# Altium PCB Pet_Feeder_PCB.PcbDoc (part 3 of 3)
Units mil, origin at the board's own origin, x right, y up, seen from the top; angles counter-clockwise.
Board outline 3600 x 2700 mil, 2 copper layers (Top Layer, Bottom Layer); 99 components, 71 nets, 320 pads, 396 vias.
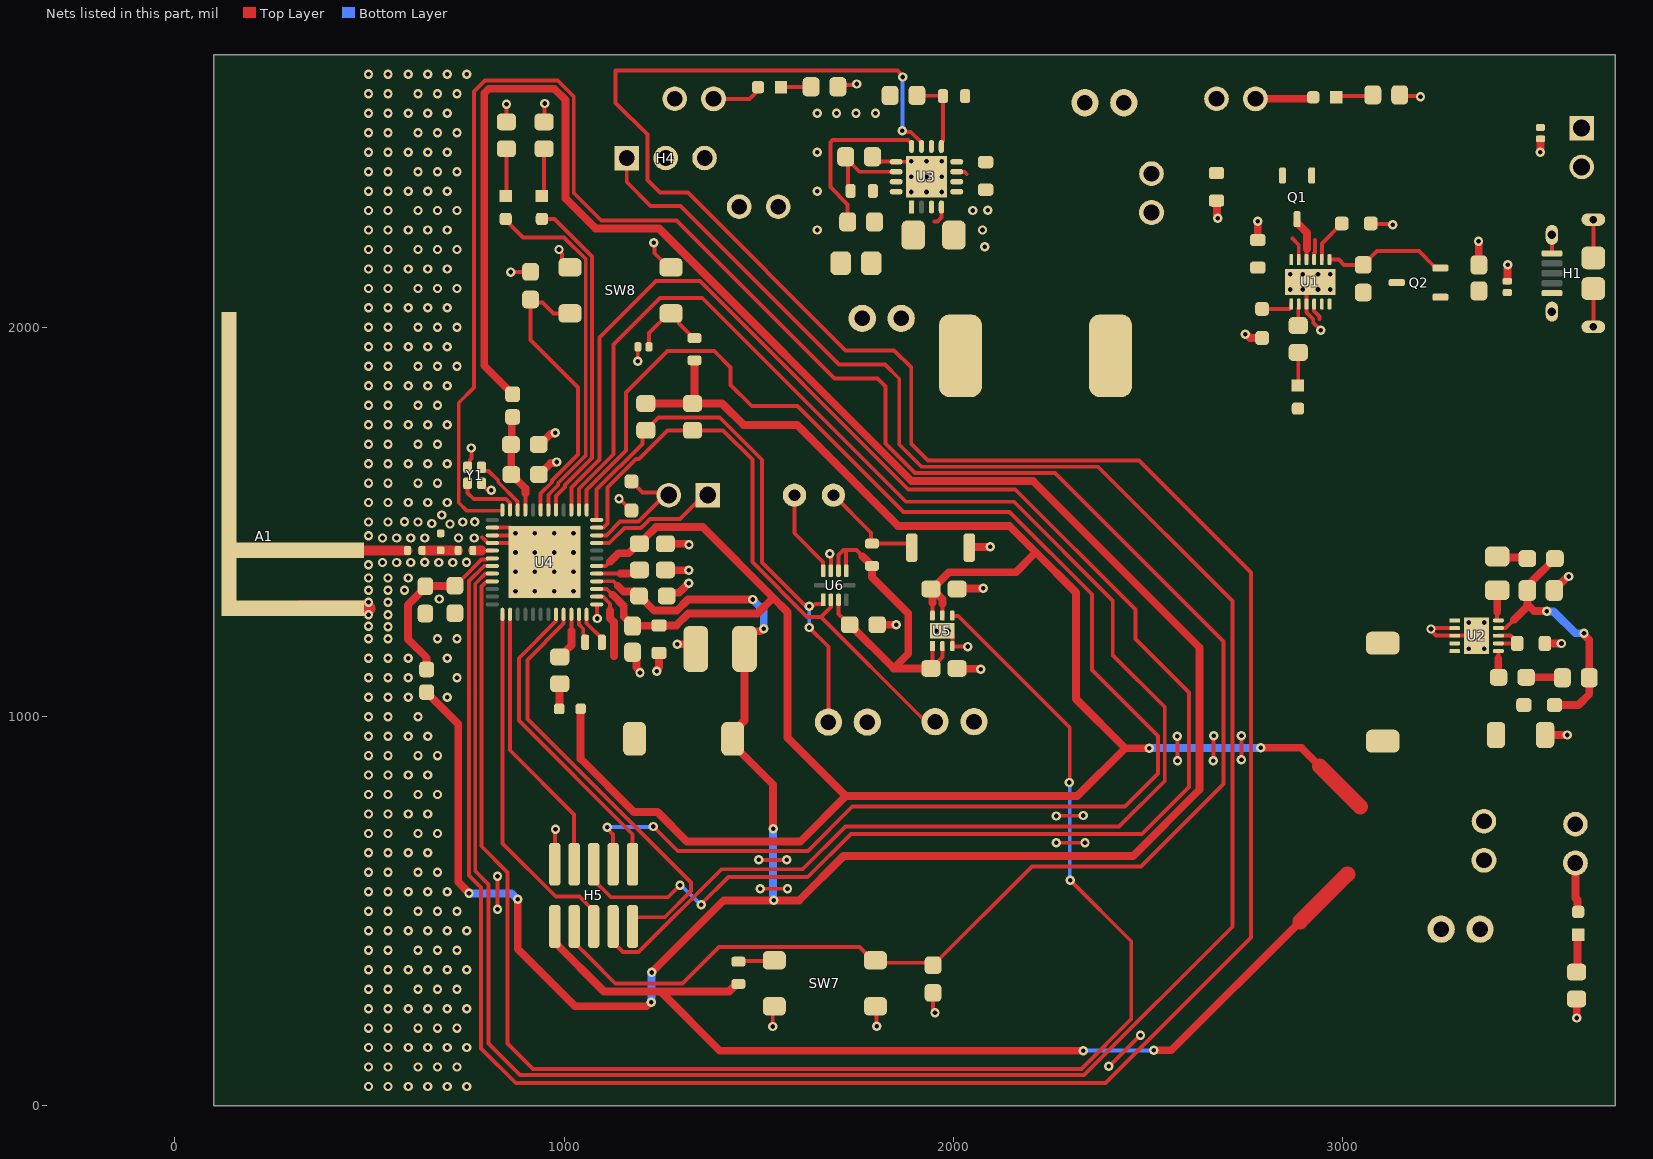
[diagram p2: the nets of this part, all layers, seen from the top]

## Part data (continued)
U5: library part ADP196ACPZN-R7, "ICHIGH-SIDELOADSWITCH6LFCSP", Case/Package="LFCSP EP", Manufacturer="Analog Devices", Max Input Voltage=5.5V, Max Operating Temperature=85°C, Max Output Current=3A, Max Supply Current=4A, Min Input Voltage=1.8V, Min Operating Temperature=-40°C, On-State Resistance=36mR, Operating Supply Current=250nA, Output Current=5A, Package Quantity=3000, Category="Power Management ICs", ComponentLink1Description=http://www.mouser.com/ds/2/609/ADP196-878889.pdf?src-supplier=Mouser, ComponentLink1URL=http://www.mouser.com/ds/2/609/ADP196-878889.pdf?src-supplier=Mouser, ComponentLink2Description=http://components.arrow.com/part/dataview/58949242S513746N2771?src-supplier=Arrow+Electronics, ComponentLink2URL=http://components.arrow.com/part/dataview/58949242S513746N2771?src-supplier=Arrow+Electronics, ComponentLink3Description=http://components.arrow.com/part/dataview/1762_07011809?src-supplier=Arrow+Europe, ComponentLink3URL=http://components.arrow.com/part/dataview/1762_07011809?src-supplier=Arrow+Europe, ComponentLink4Description=http://www.analog.com/static/imported-files/data_sheets/ADP196.pdf?src-supplier=Avnet, ComponentLink4URL=http://www.analog.com/static/imported-files/data_sheets/ADP196.pdf?src-supplier=Avnet, ComponentLink5Description=http://www.analog.com/media/en/technical-documentation/data-sheets/ADP196.pdf?src-supplier=Digi-Key, ComponentLink5URL=http://www.analog.com/media/en/technical-documentation/data-sheets/ADP196.pdf?src-supplier=Digi-Key, ComponentLink6Description=https://www.analog.com/media/en/technical-documentation/data-sheets/ADP196.pdf?src-supplier=Digi-Key, ComponentLink6URL=https://www.analog.com/media/en/technical-documentation/data-sheets/ADP196.pdf?src-supplier=Digi-Key, Fault Protection="Over Temperature", Interface=On/Off, Lead Free="Contains Lead", Manufacturer Part Number=ADP196ACPZN-R7, Mount="Surface Mount", Number of Outputs=1, Number of Pins=6, Operating Supply Voltage=5.5V, Output Configuration="High Side", Packaging="Tape and Reel", Pricing 1="1=1.72000, 10=1.54500, 25=1.45760, 100=1.24180, 250=1.16600, 500=1.02024, 1000=0.90750 (USD)", Radiation Hardening=No, RoHS=Yes, Series=-, Supplier 1=Digi-Key, Turn-On Delay Time=2ms
U6: "Proximity and Ambient Light Sensor Digital Output 1.8V/2.5V/3.3V Automotive 10-Pin QFN T/R", Case/Package=QFN, Manufacturer="Silicon Labs", Max Operating Temperature=85°C, Max Supply Voltage=3.6V, Min Operating Temperature=-40°C, Min Supply Voltage=1.71V, Operating Supply Voltage=1.8V, Package Quantity=1, Category="Optical Sensors", ComponentLink1Description=https://datasheet.ciiva.com/8113/+si114x-8113760.pdf?src-supplier=Avnet, ComponentLink1URL=https://datasheet.ciiva.com/8113/+si114x-8113760.pdf?src-supplier=Avnet, ComponentLink2Description=https://datasheet.ciiva.com/12088/si114x-41368-12088691.pdf?src-supplier=Mouser, ComponentLink2URL=https://datasheet.ciiva.com/12088/si114x-41368-12088691.pdf?src-supplier=Mouser, ComponentLink3Description=https://datasheet.ciiva.com/2819/si114x-2819368.pdf?src-supplier=Digi-Key, ComponentLink3URL=https://datasheet.ciiva.com/2819/si114x-2819368.pdf?src-supplier=Digi-Key, ComponentLink4Description=https://datasheet.ciiva.com/2819/si114x-2819369.pdf?src-supplier=Digi-Key, ComponentLink4URL=https://datasheet.ciiva.com/2819/si114x-2819369.pdf?src-supplier=Digi-Key, ComponentLink5Description=https://datasheet.ciiva.com/2819/si114x-2819370.pdf?src-supplier=Digi-Key, ComponentLink5URL=https://datasheet.ciiva.com/2819/si114x-2819370.pdf?src-supplier=Digi-Key, ComponentLink6Description=https://datasheet.ciiva.com/26808/getdatasheetpartid-567972-26808183.pdf?src-supplier=Verical, ComponentLink6URL=https://datasheet.ciiva.com/26808/getdatasheetpartid-567972-26808183.pdf?src-supplier=Verical, Manufacturer Part Number=SI1141-A11-GMR, Number of Pins=10, Output Configuration=Analog, Output Type=I2C, Packaging="Tape and Reel", Pricing 1="1=7.03000, 5=6.20400, 10=5.48000, 25=4.44640, 50=3.92920, 100=3.82580, 500=3.20540, 1000=2.99860 (USD)", Radiation Hardening=No, REACH SVHC=Unknown, RoHS=Yes, RoHS Compliant=Yes, Sensing Distance=500mm, Sensing Method=Optical, Series=-, Stock 1=9895, Supplier 1=Digi-Key
Y1: library part 8Q-38.400MAAC-T, "Crystal 38.4MHz ±30ppm (Tol) ±30ppm (Stability) 9pF FUND 80Ohm 4-Pin SMD T/R", Manufacturer=TXC, Category=Uncategorized, Manufacturer Part Number=8Q-38.400MAAC-T, Pricing 1="1=0.79000, 10=0.69700, 50=0.65140, 100=0.57570, 500=0.54540, 1000=0.45450 (USD)", RoHS=No, Stock 1=3000, Supplier 1=Digi-Key
Y2: library part ABS05-32.768KHZ-7-T, "CRYSTAL 32.768KHZ 7PF SMD", Manufacturer=Abracon, Category=Uncategorized, Manufacturer Part Number=ABS05-32.768KHZ-7-T, Pricing 1="1=1.51000, 10=1.44500, 50=1.41120, 100=1.20960, 500=1.17600, 1000=0.99120 (USD)", RoHS=No, Stock 1=18000, Supplier 1=Digi-Key

## Via types
v1: diameter 24, hole 12, Top Layer to Bottom Layer, tented both sides, 396 vias

## Nets (pads, with @x,y where several pads share a name; then routed paths per layer and width w, separated by ;. In a path a pad name is that pad's centre, name@x,y a point inside that pad or via, vN(x,y) a via of type N, cw(c..) or ccw(c..) an arc to the next point about the centre after c; other vN are vias at no path point)
+3V3_AVDD: R15.2 U4.34 | length 123.6
  Top Layer w10: R15.2@989,1153.45 R15.2@989,1153.65 ; U4.34@1018.69,1262.89 1018.73,1262.84 1018.73,1242.27 1019,1242 1019,1220
  Top Layer w20: R15.2@989,1153.65 991.71,1153.65 1003.1,1165.04 1003.1,1167.75 1019,1183.65 1019,1220
+3V3_PAVDD: C15.1 C16.1 FB2.2 U4.18 | length 455
  Top Layer w10: C16.1@719.57,1336.67 721.74,1336.67 739.38,1354.31 739.5,1354.31 788.42,1403.22 800.29,1403.22 803.86,1406.79 U4.18@815.73,1406.79
  Top Layer w20: FB2.2@647,1121.13 647,1151 599,1199 599,1287.16 643.73,1331.89 C15.1@643.73,1334.84 644.65,1335.76 718.66,1335.76 C16.1@718.66,1336.74 ; C16.1@719.57,1336.67 C16.1@719.57,1338.1
+3V3_RFVDD: C13.1 C14.1 FB1.2 U4.9 | length 256.2
  Top Layer w10: U4.9@900.57,1531 U4.9@900.57,1531 900.62,1573.19
  Top Layer w20: C14.1@864.57,1622 865.1,1622 900.62,1586.48 900.62,1573.19 ; C14.1@864.66,1622.44 864.12,1622.44 864.12,1698.62 C13.1@863.68,1699.06 865.84,1701.22 865.84,1767.71 FB1.2@868,1769.87
+3V3_V_DCDC: C19.1 C20.1 FB1.1 FB2.1 L5.2 U4.40 | length 7980.3
  Top Layer w10: U4.40@1083.84,1347.73 1126.78,1347.73 1137.98,1336.54
  Top Layer w20: FB2.1@647,1062.87 647,1062.08 728,981.08 728,575.08 756,547.08 v1(756,546) ; FB1.1@868,1828.13 795,1901.13 795,2601.28 806.72,2613 975,2613 1004,2584 1004,2331 1081,2254 1243.83,2254 1892.83,1605 2205,1605 2632,1178 2632,812 2462,642 1718,642 1604,528 v1(1539,528) 1410,528 v1(1225,343) ; v1(881,531) 881,403 1028,256 1212,256 1221.23,265.23 1223.23,265.23 v1(1224,266) ; 1137.98,1336.54 1153.37,1321.14 1181.42,1321.14 C20.1@1192.57,1310 1194,1310 1231.65,1272.35 1289.62,1272.35 1318.27,1301 v1(1485,1301) ; v1(1513,1226) 1511.92,1226 1505.5,1219.58 1485.04,1219.58 1463.6,1198.14 1463.6,989.97 1432.98,959.36 1432.98,929.22 1537,825.2 v1(1537,712)
  Bottom Layer w20: v1(756,546) 864.92,546 879.92,531 v1(881,531) ; v1(1224,266) 1224.5,266.5 1224.5,342.5 v1(1225,343) ; v1(1485,1301) 1485,1299.92 1513,1271.92 v1(1513,1226) ; v1(1537,712) 1537,531.08 1539,529.08 v1(1539,528)
+3V3_V_MCU: C17.1 C18.1 C22.1 C24.1 FB3.1 H5.1 R18.2 R19.2 R22.2 R23.2 SW3.2 U4.39 U4.42 U5.5 U5.6 | length 8995.5
  Top Layer w10: U4.39@1083.84,1328.05 1083.89,1328 1109.74,1328 1124.73,1313.01 ; U4.42@1083.84,1387.1 1083.89,1387.15 1107.15,1387.15 1118,1398 ; C18.1@1162.94,1247.49 C18.1@1176.98,1233.45 ; U5.6@1946.41,1259.74 1946.41,1292.59 ; U5.5@1972,1259.74 1972,1290
  Top Layer w20: H5.1@976,461 976,420.5 1102.5,294 1248,294 ; FB3.1@1042.56,1020 1042.56,891.44 1179,755 1240,755 1316,679 1607,679 1724,796 ; 1118,1398 1140,1420 1166.14,1420 1190.14,1444 1196.04,1444 1207.63,1455.59 1207.63,1458.1 1236.54,1487 1356,1487 1537.5,1305.5 ; 1124.73,1313.01 1153.39,1284.35 1153.39,1257.04 C18.1@1162.94,1247.49 ; C18.1@1176.98,1233.45 1243.02,1233.45 C17.1@1244,1234.43 1288.48,1234.43 1319.04,1265 1497,1265 1537.5,1305.5 ; R22.2@1210,1804.45 R23.2@1330,1804.45 ; R19.2@1335,1915.46 1335,1809.45 R23.2@1330,1804.45 ; R18.2@1448,313.46 1445.2,310.66 1440.28,310.66 1423.62,294 1248,294 ; 1946.41,1292.59 1946.41,1324.13 C24.1@1942.54,1328 C24.1@1945.94,1328 ; 1972,1290 1972,1301.94 C24.1@1945.94,1328 ; v1(2334,142) 1400,142 1248,294 ; v1(2503,919) 2441.2,919 ; v1(2515,143) 2560,143 2890.72,473.72 ; v1(2790,920) 2894,920 2941,873 ; R23.2@1330,1804.45 1405.72,1804.45 1461.16,1749 1599,1749 1858,1490 2144,1490 2212,1422 ; 1537.5,1305.5 1574,1269 1574,946 1724,796 ; 1724,796 2318.2,796 2441.2,919 ; C24.1@1945.94,1328 1988.94,1371 2161,1371 2212,1422 ; 2212,1422 2315,1319 2315,1045.19 2441.2,919
  Top Layer w40: 2890.72,473.72 3012.5,595.5 ; 2941,873 3045,769
  Bottom Layer w10: v1(2334,142) 2334.5,142.5 2514.5,142.5 v1(2515,143)
  Bottom Layer w20: v1(2503,919) 2503.5,919.5 2789.5,919.5 v1(2790,920)
+3V3_V_MCU_OUT: C6.1 C7.1 R6.2 SW3.1 SW4.1 TP2.1 U2.6 | length 67.9
  Top Layer w10: 3400,1150 3400.1,1150.1 U2.6@3400.1,1168.63
  Top Layer w20: 3400,1150 3400,1101.57 C6.1@3400.57,1101
+3V3_V_PX: C23.2 C25.1 R16.2 U5.1 U5.2 U6.3 U6.6 U6.7 | length 970.7
  Top Layer w10: 1705,1264.57 U6.3@1705,1300 ; U6.7@1705,1374.81 1705,1415 1717.69,1427.69 1724.69,1427.69 ; 1705.41,1264.16 1720.93,1248.64 1720.93,1248.1 C23.2@1733.03,1236 ; U6.6@1724.69,1374.81 1724.69,1427.69 ; 1766.82,1411.64 1750.77,1427.69 1724.69,1427.69 ; C25.1@1942.54,1124 C25.1@1946.41,1127.87 ; U5.1@1946.41,1181 C25.1@1946.41,1127.87 ; U5.2@1972,1181 1972,1153.46 C25.1@1946.41,1127.87
  Top Layer w20: C23.2@1733.03,1236 C23.2@1733.57,1236 ; C23.2@1734.55,1236 1846.55,1124 ; 1766.82,1411.64 R16.2@1791,1387.46 1791,1358 1884,1265 1884,1161.45 1846.55,1124 ; C25.1@1942.54,1124 1846.55,1124
+3V7_V_BAT: D2.2 H2.1 Q1.3 U1.10 | length 103.7
  Top Layer w10: U1.10@2907.16,2174.09 2907.16,2199.76 2908.39,2201
  Top Layer w20: Q1.3@2884.14,2267.23 2908.39,2242.98 2908.39,2201
+3V7_V_BOOST_IN: L2.2 U3.3 U3.4 | length 49.6
  Top Layer w10: 1951,2272 1959.07,2272 1969.39,2282.32 U3.4@1969.39,2309.24
+3V7_V_LOAD: C5.1 C9.1 L2.1 R11.2 SW1.2 TP1.1 U2.1 U2.7 U2.8 U3.8 | length 106.7
  Top Layer w10: U2.7@3400.1,1188.32 3400.18,1188.24 3448.33,1188.24 C5.1@3448.57,1188 3448.57,1190.38 3430.95,1208 U2.8@3400.1,1208
+3V7_V_LOAD_OUT: C1.1 Q1.2 SW1.1 SW2.1 U1.11 | length 60.8
  Top Layer w10: 2870.93,2228.07 2887.39,2211.61 2887.39,2174.17 U1.11@2887.47,2174.09
+5V0_USB: C2.1 C3.1 D1.2 H1.1 Q2.2 U1.6
+5V0_USB_IN: C4.1 LED2.A Q2.3 U1.4 U1.5 U1.12 | length 44
  Top Layer w10: U1.4@2926.84,2059.91 2926.92,2059.83 2926.92,2041.63 2940.38,2028.17 2940.38,2021.55
+5V0_V_SERVO: H4.2 SW5.2
+5V0_V_SERVO_OUT: C10.1 C11.1 R10.2 R24.2 SW5.1 SW6.1 TP3.1 U3.1 U3.15 U3.16
DECOUPLE: C21.1 U4.41 | length 113.7
  Top Layer w10: U4.41@1083.84,1367.42 1145.33,1367.42
  Top Layer w20: 1145.33,1367.42 1183.95,1367.42 C21.1@1193.54,1377
FB: R10.1 R12.1 U3.14 | length 228.8
  Top Layer w10: R12.1@1723.35,2438.24 1723.35,2435.29 R12.1@1729.8,2428.84 ; R10.1@1736.25,2350.24 1729.8,2356.7 R12.1@1729.8,2428.84 ; U3.14@1853.24,2399.8 1758.84,2399.8 R12.1@1729.8,2428.84
GND: A1.GND C1.2 C3.2 C4.2 C5.2 C7.2 C9.2 C10.2 C11.2 C12.2 C13.2 C14.2 C15.2 C16.2 C17.2 C18.2 C19.2 C20.2 C21.2 C22.2 C23.1 C24.2 C25.2 C26.2 C27.2 C28.2 D1.1 D2.1 D3.1 H1.5 H1.S1 H1.S2 H1.S3 H1.S4 H1.S5 H1.S6 H2.2 H4.3 H5.2 R2.1 R3.2 R4.2 R8.1 R9.1 R12.2 R13.1 R14.1 R17.1 R20.1 R21.1 SW7.3 SW7.4 SW8.3 SW8.4 TP1.2 TP2.2 TP3.2 TP4.2 TP5.2 U1.3 U1.13 U2.2 U2.3 U2.11 U3.5 U3.6 U3.7 U3.10 U3.13 U3.17 U4.14 U4.15 U4.16 U4.37 U4.49 U5.3 U5.7 U6.8 Y1.2 Y1.4 | length 4203.6
  Top Layer w10: Y1.2@752.28,1640.67 758.54,1646.92 758.54,1659.54 762,1663 v1(762,1690) ; Y1.4@787.72,1599.33 787.72,1596.87 801.71,1582.88 812.25,1582.88 v1(813.2,1581.93) ; 789.5,1460.84 798.29,1452.06 797.96,1452.06 803.86,1446.16 U4.16@815.73,1446.16 U4.49@900.57,1446.16 ; U4.15@815.73,1465.84 U4.49@880.89,1465.84 ; U4.14@815.73,1485.53 861.2,1485.53 v1(875.38,1471.35) U4.49@880.89,1465.84 ; v1(829,505) v1(829,590) ; R21.1@851.78,2527.65 851.89,2527.76 851.89,2572.89 v1(852,2573) ; v1(863,2142) 863.22,2142.22 913.78,2142.22 C28.2@914,2142.43 ; R20.1@948.78,2527.65 949.39,2528.26 949.39,2574.39 v1(950,2575) ; U4.49@949.79,1396.94 v1(924.98,1421.75) U4.49@900.57,1446.16 ; H5.2@976,621 977,622 977,710 v1(978,711) ; v1(987,2200) 987,2196.21 994.76,2188.46 994.76,2172.16 1012.86,2154.05 SW8.4@1015.08,2154.05 ; U4.37@1083.84,1288.68 1084.4,1288.68 1084.51,1288.57 1084.51,1252.67 v1(1085.17,1252) ; v1(1141,1560) 1141.8,1560 1172.2,1529.6 R17.1@1173,1529.6 ; v1(1189,1913) 1189.32,1913.32 1189.32,1949.69 D3.1@1189.63,1950 ; v1(1230,2217) 1232.68,2214.32 1232.68,2190.39 1269.02,2154.05 SW8.3@1274.92,2154.05 ; v1(1500,632) v1(1572,632) ; v1(1504,558) v1(1574,558) ; v1(1536,204) 1536,251.87 SW7.3@1540.08,255.94 ; v1(1682.25,1418.41) 1682.25,1414.62 1685.32,1411.56 U6.8@1685.32,1374.81 ; R14.1@1703.45,2618 1707.77,2622.32 1749.32,2622.32 v1(1752,2625) ; R12.2@1792.24,2438.24 1804.38,2426.11 1852.52,2426.11 U3.13@1853.24,2425.39 1892.61,2425.39 1894,2424 v1(1931,2387) ; SW7.4@1799.92,255.94 1803,252.87 v1(1803,205) ; C27.2@1948,290.57 1948,247.79 1953,242.79 v1(1953,239) ; U5.7@1972,1220.37 v1(1987.75,1220.37) 1990.19,1220.37 1997.59,1212.97 U5.3@1997.59,1181 1998.09,1180.5 2036.5,1180.5 v1(2037,1180) ; U3.7@2008.76,2399.8 2009.48,2399.07 2028.64,2399.07 2034.51,2393.21 ; C25.2@2009.46,1124 C25.2@2010.46,1123 ; v1@2069,1123 v1(2070,1122) ; v1(2264,676) v1(2338,676) ; v1(2264,745) 2264.5,745.5 2333.5,745.5 v1(2334,746) ; v1(2399.26,101.74) 2400.24,101.74 2479.76,181.26 v1(2480.74,181.26) ; v1(2575,950) 2575.5,949.5 2575.5,887.5 v1(2576,887) ; v1(2668,887) 2668.5,887.5 2668.5,950.5 v1(2669,951) ; v1(2740,889) v1(2740,951) ; U1.13@2917,2117 2907.16,2107.16 U1.3@2907.16,2059.91 2907.24,2059.83 2907.24,2038.69 2924.38,2021.55 2924.38,2012.56 v1(2944.2,1992.74) ; R4.2@3072.4,2267 3073.9,2265.5 3127.5,2265.5 v1(3129,2264) ; R2.1@3148.95,2594.5 v1@3197.5,2594.5 ; U2.2@3287.9,1227.69 3233.47,1227.69 3230.79,1225 v1(3227,1225) 3227,1221.21 3240.21,1208 U2.11@3344,1208 ; H1.5@3537.7,2190.18 H1.S2@3537.7,2237.43 ; H1.S3@3644,2001.2 H1.S4@3644,2099.63 ; H1.S5@3644,2178.37 H1.S6@3644,2276.8 ; U4.49@880.89,1465.84 U4.49@900.57,1446.16
  Top Layer w20: C13.2@934.55,1699.06 938.69,1699.06 965.95,1726.32 974.32,1726.32 v1(977,1729) ; C14.2@935.43,1622 936.42,1622 965.74,1651.32 978.32,1651.32 v1(981,1654) ; C18.2@1176,1165.54 1185.86,1155.68 1185.86,1125.93 1195,1116.79 v1(1195,1113) ; v1(1238,1117) 1238,1120.79 1244,1126.79 C17.2@1244,1163.57 ; C21.2@1260.46,1377 1261.46,1376 v1(1320,1376) ; C22.2@1260.46,1444 1317.92,1444 1319.92,1442 v1(1321,1442) ; C20.2@1263.43,1310 1271.84,1318.4 1295.4,1318.4 v1@1319.23,1342.23 ; v1(1291,1186) 1326.4,1186 C19.2@1338.4,1174 ; C23.1@1804.43,1236 v1(1853,1236) ; C11.2@2001.33,2237 C11.2@2004.33,2240 ; C24.2@2009.46,1328 2010.46,1329 2076,1329 v1(2077,1330) ; C25.2@2010.46,1123 v1@2069,1123 ; C26.2@2040.83,1434 2042.44,1435.61 2093.65,1435.61 v1(2094.42,1436.38) ; C1.2@2676,2325.57 2677.5,2324.07 2677.5,2281.5 v1(2679,2280) ; v1(2750,1982) 2752.92,1982 2762.32,1972.6 R3.2@2793,1972.6 ; C4.2@2782,2224.43 v1(2782,2273) ; v1(3349,2221) 3349.5,2220.5 3349.5,2160.96 C3.2@3350,2160.46 ; D1.1@3423,2118.37 3423.5,2118.87 3423.5,2160.5 v1(3424,2161) ; v1(3508,2450) D2.1@3508,2484.63 ; C5.2@3519.43,1188 v1(3562,1188) ; C7.2@3519.99,953 v1(3577,953) ; R8.1@3543.45,1324 3543.45,1325.19 3578.26,1360 v1(3581,1360) ; R9.1@3601,275 3601.2,274.8 3601.2,226.09 v1(3601.4,225.89)
  Top Layer w40: A1.GND@320,1278 495,1278
  other v1: 497.8,50 547.8,50 600,50 650,50 700,50 750,50 497.8,100 547.8,100 625,100 675,100 725,100 497.8,150 547.8,150 600,150 650,150 700,150 750,150 497.8,200 547.8,200 625,200 675,200 725,200 497.8,250 547.8,250 600,250 650,250 700,250 750,250 497.8,300 547.8,300 625,300 675,300 725,300 497.8,350 547.8,350 600,350 650,350 700,350 750,350 497.8,400 547.8,400 625,400 675,400 725,400 497.8,450 547.8,450 600,450 650,450 700,450 750,450 497.8,500 547.8,500 625,500 675,500 725,500 497.8,550 547.8,550 600,550 650,550 700,550 497.8,600 547.8,600 625,600 675,600 497.8,650 547.8,650 600,650 650,650 497.8,700 547.8,700 625,700 675,700 497.8,750 547.8,750 600,750 650,750 497.8,800 547.8,800 625,800 675,800 497.8,850 547.8,850 600,850 650,850 497.8,900 547.8,900 625,900 675,900 497.8,950 547.8,950 600,950 650,950 497.8,1000 547.8,1000 625,1000 497.8,1050 547.8,1050 600,1050 700,1050 497.8,1100 547.8,1100 600,1100 725,1100 497.8,1150 547.8,1150 600,1150 700,1150 3324.32,1174.14 3363.68,1174.14 497.8,1200 547.8,1200 675,1200 725,1200 1956.25,1220.37 547.8,1231 497.8,1232 3324.32,1241.86 3363.68,1241.86 497.8,1262 547.8,1262 497.8,1294 547.8,1294 679.46,1302.29 875.38,1322.54 924.98,1322.54 974.59,1322.54 1024.2,1322.54 497.8,1325 547.8,1325 590,1325 1320,1343 497.8,1356 547.8,1356 600,1356 875.38,1372.14 924.98,1372.14 974.59,1372.14 1024.2,1372.14 497.8,1390 533.8,1395.87 569.8,1395.87 605.8,1395.87 641.8,1396.37 677.8,1396 713.8,1396 749.24,1396.56 875.38,1421.75 974.59,1421.75 1024.2,1421.75 533.8,1459 569.8,1459 605.8,1459 641.8,1459 728.84,1459 769.58,1459 497.8,1465 924.98,1471.35 974.59,1471.35 1024.2,1471.35 707,1495 660,1496 497.8,1500 547.8,1500 625,1500 740,1500 770.8,1500.24 590,1501 686,1518 497.8,1550 547.8,1550 600,1550 650,1550 700,1550 497.8,1600 547.8,1600 625,1600 675,1600 497.8,1650 547.8,1650 600,1650 650,1650 700,1650 497.8,1700 547.8,1700 625,1700 675,1700 497.8,1750 547.8,1750 600,1750 650,1750 700,1750 497.8,1800 547.8,1800 625,1800 675,1800 497.8,1850 547.8,1850 600,1850 650,1850 700,1850 497.8,1900 547.8,1900 625,1900 675,1900 725,1900 497.8,1950 547.8,1950 600,1950 650,1950 700,1950 497.8,2000 547.8,2000 625,2000 675,2000 725,2000 497.8,2050 547.8,2050 600,2050 650,2050 700,2050 2865.82,2097.32 2897.32,2097.32 2936.68,2097.32 2968.18,2097.32 497.8,2100 547.8,2100 625,2100 675,2100 725,2100 2865.82,2136.68 2897.32,2136.68 2936.68,2136.68 2968.18,2136.68 497.8,2150 547.8,2150 600,2150 650,2150 700,2150 497.8,2200 547.8,2200 625,2200 675,2200 725,2200 2081,2207 497.8,2250 547.8,2250 600,2250 650,2250 700,2250 1650,2250 2075,2250 497.8,2300 547.8,2300 625,2300 675,2300 725,2300 2050,2300 2088,2301 1891.63,2347.63 1931,2347.63 1970.37,2347.63 497.8,2350 547.8,2350 600,2350 650,2350 700,2350 1650,2350 1891.63,2387 1970.37,2387 497.8,2400 547.8,2400 625,2400 675,2400 725,2400 1891.63,2426.37 1931,2426.37 1970.37,2426.37 497.8,2450 547.8,2450 600,2450 650,2450 700,2450 1650,2450 497.8,2500 547.8,2500 625,2500 675,2500 725,2500 497.8,2550 547.8,2550 600,2550 650,2550 700,2550 1650,2550 1700,2550 1750,2550 1800,2550 3200,2592 497.8,2600 547.8,2600 625,2600 675,2600 725,2600 497.8,2650 547.8,2650 600,2650 650,2650 700,2650 750,2650
LBI: R11.1 R13.2 U3.9 | length 198.7
  Top Layer w10: R13.2@1906.45,2595.91 1907.36,2594.99 1972.47,2594.99 R11.1@1973.38,2594.07 1973.38,2479.62 1969.39,2475.62 U3.9@1969.39,2464.76
LBO: R24.1 U3.12 | length 445.5
  Top Layer w10: R24.1@1728.55,2271 1728.55,2315.62 1684,2360.18 1684,2475.14 1689.86,2481 1883.72,2481 1888.23,2476.49 1889.7,2476.49 1892.61,2473.58 U3.12@1892.61,2464.76
LED0: LED5.A U4.5 | length 857.8
  Top Layer w10: LED5.A@943,2278.47 975.08,2278.47 1071.61,2181.94 1071.61,1663.95 1002.39,1594.73 1002.39,1590.19 979.32,1567.12 U4.5@979.32,1531
LED1: LED6.A U4.6 | length 929
  Top Layer w10: LED6.A@849.78,2269.65 855.69,2269.65 894.33,2231 999.92,2231 1055.61,2175.31 1055.61,1670.57 985.07,1600.04 985.07,1595.5 959.63,1570.06 U4.6@959.63,1531
LFX_N: U4.36 Y2.1 | length 88.1
  Top Layer w10: U4.36@1058.06,1262.89 1058.1,1262.84 1058.1,1240.05 1097.31,1200.84 Y2.1@1097.31,1191
LFX_P: U4.35 Y2.2 | length 78.4
  Top Layer w10: U4.35@1038.37,1262.89 1038.37,1236.75 1049.43,1225.69 1049.43,1195.57 Y2.2@1054,1191
NetA1_FEED: A1.FEED L4.2 | length 279.9
  Top Layer w25: A1.FEED@318.12,1426.84 L4.2@598.03,1426.84
NetC2_2: C2.2 Q2.1 U1.7 | length 323.5
  Top Layer w10: U1.7@2966.21,2174.09 2990.32,2174.09 3003.98,2160.43 C2.2@3053,2160.43 3088.57,2196 3196,2196 3235.43,2156.57 3235.43,2156.26 3239.29,2152.4 Q2.1@3251.1,2152.4
NetC6_2: C6.2 R5.2 | length 92.1
  Top Layer w20: C6.2@3471.43,1101 R5.2@3563.55,1101
NetC8_1: C8.1 R5.1 R6.1 R8.2 U2.9 | length 670.3
  Top Layer w10: U2.9@3408.88,1227.75 3418.75,1227.75 3440,1249
  Top Layer w20: 3440,1249 3471.11,1280.11 ; v1(3524,1271) 3523.23,1271.77 3491.23,1271.77 3482.89,1280.11 3474.55,1288.45 R8.2@3474.55,1324 3486.37,1335.82 3486.37,1347.93 3544.45,1406 C8.1@3545.43,1406 ; R6.1@3544.37,1030 3606,1030 3633.45,1057.45 3633.45,1196.76 3620,1210.21 v1(3620,1214)
  Bottom Layer w20: v1(3524,1271) 3524.77,1270.23 3541.77,1270.23 3598,1214 v1(3620,1214)
NetC8_2: C8.2 R7.2 | length 79.8
  Top Layer w20: R7.2@3397,1411.31 3399.65,1408.65 3471.91,1408.65 C8.2@3474.57,1406
NetC12_1: C12.1 L3.2 L4.1 | length 92.5
  Top Layer w25: L4.1@635.43,1426.84 635.56,1426.97 672.26,1426.97 C12.1@685.61,1426.97 ; C12.1@685.86,1426.97 727.91,1426.97 L3.2@728.03,1426.84
NetC26_1: C26.1 IR1.1 R16.1 | length 272.5
  Top Layer w10: IR1.1@1692,1569 1788.66,1472.34 1788.66,1446.88 R16.1@1791,1444.54 1883.53,1444.54 1893.17,1434.9 C26.1@1893.17,1434
NetD3_2: D3.2 R19.1 SW8.1 | length 204.9
  Top Layer w10: D3.2@1218.37,1950 1218.37,1985.3 1269.02,2035.94 1277.14,2035.94 1295.24,2017.84 1295.24,2009.72 1323.15,1981.81 1323.15,1980.23 1330.84,1972.54 R19.1@1335,1972.54
NetFB3_2: FB3.2 R15.1 | length 65.2
  Top Layer w20: FB3.2@987.44,1020 988.22,1020.78 988.22,1083.77 R15.1@989,1084.55
NetIR1_2: IR1.2 U6.9 | length 224.7
  Top Layer w10: IR1.2@1592,1569 1592,1471 1665.63,1397.37 U6.9@1665.63,1374.81
NetL1_1: L1.1 U2.4
NetL1_2: L1.2 U2.5
NetL3_1: L3.1 U4.17 | length 50.5
  Top Layer w10: 787.84,1426.84 788.21,1426.47 U4.17@815.73,1426.47
  Top Layer w25: L3.1@765.43,1426.84 787.84,1426.84
NetL5_1: L5.1 U4.38 | length 181.3
  Top Layer w10: U4.38@1083.84,1308.36 1083.89,1308.32 1099.73,1308.32 1118,1290.05 1118,1273
  Top Layer w20: 1118,1273 1118,1253 1128,1243 1128,1156 1129,1155
NetLED1_A: LED1.A SW2.2 | length 148.1
  Top Layer w20: SW2.2@2776,2587 LED1.A@2924.09,2587
NetLED1_C: LED1.C R2.2 | length 90.1
  Top Layer w10: LED1.C@2984.43,2594 R2.2@3074.55,2594
NetLED2_C: LED2.C R1.1 | length 85.4
  Top Layer w10: LED2.C@2885,1850.53 2886,1851.53 R1.1@2886,1935.55
NetLED3_A: LED3.A SW4.2 | length 131.3
  Top Layer w20: SW4.2@3598,624 3598,534.35 3603.35,529 3603.35,496.56 LED3.A@3605,496.56
NetLED3_C: LED3.C R9.2 | length 99.2
  Top Layer w20: R9.2@3601,343.9 3603,345.9 3603,439.44 LED3.C@3605,441.44
NetLED4_A: LED4.A SW6.2 | length 132.3
  Top Layer w10: SW6.2@1384,2587 1476.35,2587 1500.44,2611.09 LED4.A@1500.44,2617
NetLED4_C: LED4.C R14.2 | length 79.4
  Top Layer w10: LED4.C@1555.56,2617 1556.06,2617.5 1634.05,2617.5 R14.2@1634.55,2618
NetLED5_C: LED5.C R20.2 | length 127.9
  Top Layer w10: LED5.C@943,2337.53 948.78,2343.31 R20.2@948.78,2458.76 R20.2@945.78,2455.76
NetLED6_C: LED6.C R21.2 | length 122
  Top Layer w10: LED6.C@850,2337.53 851.78,2339.31 R21.2@851.78,2458.76
NetQ1_1: Q1.1 U1.9 | length 51
  Top Layer w10: U1.9@2926.84,2174.09 2926.92,2174.17 2926.92,2189.83 2929.39,2192.3 2929.39,2224
NetR1_2: R1.2 U1.2 | length 56.1
  Top Layer w10: R1.2@2886,2004.45 2886,2049.74 2887.47,2051.21 U1.2@2887.47,2059.91
NetR3_1: R3.1 U1.1 | length 85.1
  Top Layer w10: R3.1@2793,2047.4 2863.98,2047.4 2867.79,2051.21 U1.1@2867.79,2059.91
NetR4_1: R4.1 U1.8 | length 114.1
  Top Layer w10: U1.8@2946.53,2174.09 2946.53,2215.93 R4.1@2997.6,2267
NetR7_1: R7.1 U2.10 | length 80.4
  Top Layer w10: 3397,1269 3397,1247.45 3397.08,1247.37 U2.10@3400.1,1247.37
  Top Layer w20: 3397,1269 R7.1@3397,1324.69
NetR18_1: R18.1 SW7.1 | length 93.5
  Top Layer w10: R18.1@1448,370.54 1449.76,372.3 1538.32,372.3 SW7.1@1540.08,374.06
NetU4_10: U4.10 Y1.1 | length 155.2
  Top Layer w10: Y1.1@787.72,1640.67 787.72,1638.21 794.46,1631.46 806.34,1631.46 830.93,1606.87 830.93,1602.13 880.84,1552.22 880.84,1531.05 U4.10@880.89,1531
NetU4_11: U4.11 Y1.3 | length 161.9
  Top Layer w10: Y1.3@752.28,1599.33 752.28,1574.72 768.07,1558.93 850.78,1558.93 861.16,1548.55 U4.11@861.2,1531 U4.11@861.2,1531
PB_RD: C28.1 SW8.2 U4.7 | length 746.7
  Top Layer w10: U4.7@939.94,1531 939.94,1573.01 969.07,1602.13 969.07,1606.66 1036,1673.59 1036,1846 914,1968 C28.1@914,2071.57 921.78,2063.79 944.8,2063.79 972.64,2035.94 SW8.2@1015.08,2035.94
PS_EN: H3.1 U4.45 | length 335.9
  Top Layer w10: U4.45@1083.84,1446.16 1116.16,1446.16 1154.88,1484.88 1196.71,1484.88 1197.83,1486 1198.63,1486 1220.63,1508 1298,1508 H3.1@1366,1576
PS_RD: H3.2 R17.2 U4.46 | length 332.6
  Top Layer w10: U4.46@1083.84,1465.84 1108.84,1465.84 1143.88,1500.88 1190.88,1500.88 1266,1576 1201.4,1576 R17.2@1173,1604.4
PTI_DATA: H5.10 U4.32 | length 805
  Top Layer w10: U4.32@979.27,1265.57 979.27,1245.27 884,1150 884,990 1176,698 H5.10@1176,621
PTI_FRAME: H5.9 U4.33 | length 1119.5
  Top Layer w10: U4.33@999,1262.89 999,1239 906,1146 906,994 1326,574 1326,552 1258.64,484.64 1185.33,484.64 1176,475.31 H5.9@1176,461
PX_EN: U4.21 U5.4 | length 4154
  Top Layer w10: U4.21@815.73,1347.73 U4.21@815.73,1347.73 800.77,1347.69 787.8,1334.72 787.8,667.2 855,600 855,160 920,95 935,95 2329,95 2457,223 2457,423 v1(2300,580) ; U5.4@1997.59,1259.74 1997.59,1259.01 1998.5,1258.11 2012.64,1258.11 2299,971.75 2299,832 v1(2298,831)
  Bottom Layer w10: v1(2298,831) 2299,830 2299,581 v1(2300,580)
RST: C27.1 H5.3 SW7.2 U4.12 | length 6328.6
  Top Layer w10: U4.12@841.52,1531 841.52,1529.16 841.41,1529.05 749.81,1529.05 729.47,1549.39 729.47,1806.47 769,1846 769,2605.7 797.3,2634 983.7,2634 1025,2592.7 1025,2345.56 1095.56,2275 1289,2275 1695,1869 1805,1869 1826,1848 1826,1701.53 1901.53,1626 2261,1626 2694,1193 2694,827 2482,615 2201.57,615 C27.1@1948,361.43 1941.69,367.74 1806.23,367.74 SW7.2@1799.92,374.06 1794.02,374.06 1759.39,408.68 1398.3,408.68 1304.63,315 1131.47,315 1067.5,378.97 ; H5.3@1026,461 1026,420.5 1067.5,379
SCL: R23.1 TP5.1 U4.47 U6.2 | length 1544.8
  Top Layer w10: U4.47@1083.84,1485.53 1083.89,1485.57 1100.82,1485.57 1111.77,1496.52 1111.77,1588.97 1185.06,1662.26 1192.19,1662.26 1265.47,1735.55 R23.1@1330,1735.55 1408.45,1735.55 1483.72,1660.28 1483.72,1397.28 1624.52,1256.48 1659.59,1256.48 ; U6.2@1685.32,1300 1685.32,1281.32 1660.03,1256.03 1917.58,998.48 1941.52,998.48 TP5.1@1953,987
SDA: R22.1 TP4.1 U4.48 U6.1 | length 1441.7
  Top Layer w10: U4.48@1083.84,1505.21 1083.84,1583.67 1201,1700.83 1201,1726.55 1242.65,1768.2 1399.82,1768.2 1508,1660.03 1508,1396 1625,1279 1635,1279 1645.25,1289.25 1664.72,1289.25 1665.63,1290.16 U6.1@1665.63,1300 ; v1(1629.69,1228.92) 1679,1179.61 TP4.1@1679,986
  Bottom Layer w10: v1(1629.69,1228.92) 1629.73,1228.95 v1@1629.73,1283.73 ; v1@1629.73,1283.73 v1(1629.76,1283.76)
SERVO_EN: U3.11 U4.19 | length 7751.9
  Top Layer w10: U4.19@815.73,1387.1 U4.19@815.73,1387.1 794.88,1387.06 755.8,1347.98 755.8,592.2 787,561 787,148 876,59 2391,59 2765,433 2765,1370 2477,1658 1934.59,1658 1892,1700.59 1892,1897 1848,1941 1723,1941 1318,2346 1246.59,2346 1214,2378.59 1214,2495 1132.33,2576.67 1132.33,2660 1856.79,2660 1870,2646.79 v1(1870,2643) ; v1(1869,2505) 1871.68,2502.32 1890.48,2502.32 1916.97,2475.83 1916.97,2465.99 U3.11@1918.2,2464.76
  Bottom Layer w10: v1(1869,2505) 1869.5,2505.5 1869.5,2642.5 v1(1870,2643)
SWCLK: H5.8 U4.1 | length 4026.4
  Top Layer w10: U4.1@1058.06,1531 1058.06,1582.51 1159,1683.46 1159,1833 1265.25,1939.25 1385.79,1939.25 1428,1897.04 1428,1852 1482.02,1797.98 1600.02,1797.98 1872,1526 2144.35,1526 2356,1314.35 2356,1120 2526,950 2526,854 2441,769 1740.37,769 1626.37,655 1292,655 v1(1229,718) ; v1(1111,716) 1111,712.21 1126,697.21 H5.8@1126,621
  Bottom Layer w10: v1(1111,716) 1112,717 1228,717 v1(1229,718)
SWDIO: H5.7 U4.2 | length 4284.3
  Top Layer w10: U4.2@1038.37,1531 1038.37,1585.45 1127,1674.08 1127,1956 1246,2075 1355,2075 1878,1552 2156,1552 2409.33,1298.67 2409.33,1158.67 2543,1025 2543,835 2426,718 1723,718 1613,608 1404.63,608 1191.63,395 1151.5,395 1126,420.5 H5.7@1126,461
SWO: H5.6 U4.3 | length 4519.5
  Top Layer w10: U4.3@1018.69,1531 1018.69,1588.4 1091,1660.71 1091,1974 1236,2119 1349.14,2119 1884.14,1584 2159,1584 2468,1275 2468,1199 2605,1062 2605,819 2485,699 1737,699 1626,588 1422,588 1352,518 v1(1352,517) ; H5.6@1076,621 1076,580.5 1120.5,536 1267,536 v1(1298,567)
  Bottom Layer w10: v1(1298,567) 1300,567 1350,517 v1(1352,517)
V_PWM: H4.1 U4.20 | length 6352
  Top Layer w10: U4.20@815.73,1367.42 U4.20@815.73,1367.42 797.82,1367.37 771.8,1341.35 771.8,603.2 806,569 806,160 887,79 2335.63,79 2717,460.37 2717,1297 2372,1642 1918.06,1642 1861,1699.06 1861,1868 1824,1905 1706,1905 1299,2312 1222,2312 1161,2373 H4.1@1161,2435
VCOM_RX: H5.4 U4.26 | length 710.2
  Top Layer w10: U4.26@861.2,1262.89 861.2,913.8 1026,749 H5.4@1026,621
VCOM_TX: H5.5 U4.25 | length 934.9
  Top Layer w10: U4.25@841.52,1262.89 841.52,674.67 978.54,537.65 1039.85,537.65 1076,501.5 H5.5@1076,461
pads on no net: H1.2 H1.3 H1.4 U3.2 U4.4 U4.8 U4.13 U4.22 U4.23 U4.24 U4.27 U4.28 U4.29 U4.30 U4.31 U4.43 U4.44 U6.4 U6.5 U6.10

## Polygon pours and split planes (outlines as drawn)
+5V0_USB_IN on Top Layer "+5V0_USB_IN_L01_P019" (solid, remove dead copper, pour order 19): 3165.54,2129.83 3112.25,2129.83 3112.25,2069.25 3049,2006 2993.78,2006 2950,2049.78 2950,2079 2917,2079 2917,2046 2920,2043 2920,1837 2847,1837 2707,1977 2707,2105 2716,2114 2810,2114 2854,2158 2876,2158 2876,2196 2681,2196 2599,2114 2599,1978 2817,1760 3165,1760 3165,2129.29
GND on Top Layer "GND_L01_P006" (solid, remove dead copper, pour order 6): 1959,2521 1932,2521 1868,2585 1868,2601.69 1775.69,2601.69 1759,2585 1613,2585 1613,2191 1646,2158 1718,2158 1718,2232 1665,2285 1665,2491 1679,2505 1804,2505 1830,2531 1887,2531 1931,2487 1931,2446 1959,2446
+5V0_V_SERVO_OUT on Top Layer "+5V0_V_SERVO_OUT_L01_P008" (solid, remove dead copper, pour order 8): 1870,2386 1786,2386 1786,2242 1778,2234 1778,2123.7 1667.31,2123.7 1601,2190 1601,2515 1559,2557 1332,2557 1332,2640 1230,2640 1230,2557 1286,2501 1483,2501 1501,2483 1501,2187 1609,2079 1809,2079 1820,2068 1820,1957 1915,1957 1925.25,1957 1933,1957 1933,2331 1870,2331
+3V3_V_MCU_OUT on Top Layer "+3V3_V_MCU_OUT_L01_P014" (solid, remove dead copper, pour order 14): 3408,404 3408,498 3586,676 3629,676 3647,694 3647,749 3493,903 3493,1056 3470,1056 3430,1096 3430,1177 3379,1177 3379,1128 3328,1077 3328,769 3308,749 3308,699 3321,686 3425,686 3425,596 3291,462 3291,404
GND on Top Layer "ANT_GND_L01_P000" (solid, remove dead copper, pour order 0): 485.82,0 485.82,2700 800,2700 800,2600 800,0
NetQ1_1 on Top Layer "NETQ1_1_L01_P021" (solid, remove dead copper, pour order 21): 2971,2422 2908,2422 2908,2259 2921,2246 2921,2157 2971,2157
+3V7_V_LOAD_OUT on Top Layer "+3V7_V_LOAD_OUT_L01_P020" (solid, remove dead copper, pour order 20): 2729,2637 2611,2637 2457,2483 2457,2348 2732,2348 2876,2204 2876,2158 2897,2158 2897,2212 2860,2249 2860,2443 2729,2443
+3V7_V_LOAD on Top Layer "+3V7_V_LOAD_L01_P003" (solid, remove dead copper, pour order 3): 2512,2628.99 2394,2629.01 2394,2472 2224,2472 2056,2640 1996,2640 1996,2443 1990,2437 1990,2412 2062,2412 2281,2193 2281,1720 2628,1720 3105,1243 3305,1243 3305,1392 3392,1479 3599,1479 3599,1317 3525,1243 3461,1243 3436,1218 3379,1218 3379,1177 3426,1177 3426,1156 3496,1156 3496,1208 3502,1214 3594,1214 3677,1297 3677,1642 2914,1642 2574,1982 2574,2345 2454,2345 2454,2515 2512,2573
+3V7_V_BAT on Top Layer "+3V7_V_BAT_L01_P022" (solid, remove dead copper, pour order 22): 3661,2562 2948,2562 2861,2475 2861,2267 2894,2234 2894,2158 2918.7,2158 2921,2160.3 2921,2246 2896,2271 2896,2372 3021,2497 3070,2497 3535,2497 3570,2462 3661,2462
+5V0_USB on Top Layer "+5V0_USB_L01_P017" (solid, remove dead copper, pour order 17): 3576,2099 3573,2102 3398,2102 3372,2128 3309,2128 3284,2103 3233,2103 3173,2163 3119,2163 3087.61,2131.61 2987,2131.61 2987,2075 2959,2075 2959,2047 2958,2046 2964,2040 3066,2040 3096,2070 3096,2096 3130.5,2130.5 3209,2052 3488,2052 3511,2075 3576,2075
NetL5_1 on Top Layer "NETL5_1_L01_P016" (solid, remove dead copper, pour order 16): 1248,934 1248,984 1141,1091 1141,1183 1126,1198 1117,1198 1110,1191 1110,908 1141,877 1248,877 1248,933
+3V3_V_MCU on Top Layer "+3V3_V_MCU_L01_P015" (solid, remove dead copper, pour order 15): 3425,678 3424,679 3292,679 3126,845 2890,845 2890,645 2977,558 3387,558 3425,596
NetL1_2 on Top Layer "NETL1_2_L01_P011" (solid, remove dead copper, pour order 11): 3304,1177 3261.5,1177 3261.5,1103.5 3149,991 3059,991 3035,967 3035,910 3070,875 3155,875 3304,1024
NetL1_1 on Top Layer "NETL1_1_L01_P010" (solid, remove dead copper, pour order 10): 3304,1197 3176,1197 3035,1197 3035,1152 3060,1127 3147,1127 3197,1177 3304,1177
+5V0_V_SERVO on Top Layer "+5V0_V_SERVO_L01_P009" (solid, remove dead copper, pour order 9): 1253,2488 1310,2488 1310,2413 1362,2361 1498,2361 1498,2243 1488,2233 1410,2233 1268,2375 1253,2375
GND on Top Layer "GND_L01_P007" (solid, remove dead copper, pour order 7): 1990,2412 2026,2412 2063,2375 2105.06,2375 2114,2366.06 2114,2186 1983,2186 1966,2203 1966,2270 1990,2294
+3V7_V_BOOST_IN on Top Layer "+3V7_V_BOOST_IN_L01_P005" (solid, remove dead copper, pour order 5): 1933,2331 1933,2107 1939,2101 1939,1791 2120,1791 2120,2043 2066,2097 1966,2197 1966,2281 1995,2281 1995,2331
GND on Bottom Layer "GND_L02_P001" (solid, pour order 1): 485.82,2700 485.82,0 3700,0 3700,2700

## Keep-outs
Keep-Out Layer:
  the board outline again, w20

## Other copper
Top Layer:
  pour cut-out: 796.39,1445.6 794.89,1447.11 485.66,1447.11 485.66,1407.56 486.61,1408.5 795.26,1408.5 795.26,1444.66 796.21,1445.6
  pour cut-out: 779.36,1884.92 779.36,1840.5 740.69,1801.83 740.69,1668.55 791.92,1668.55 795,1665.47 799.1,1669.57 800,1669.57 800,1873.06 785.22,1887.85 782.29,1887.85

## Silkscreen, mask and mechanical layers (free items; w line width, h text height)
Top Overlay:
  lines w10: 1037,2353 1350,2353 1350,2243 1605,2243 1605,1772.78 1932.69,1772.78 1933,1772.48 1933,1662 2508,1662 ; 1070,1864 1070,1698 1510,1698 1510,1385 1575,1385 1575,870 2508,870 2508,1608 2508,1662 ; 1121,1698 1121,1487 1510,1487 ; 1605,1865 786,1865 786,2242 ; 2180,2627 2180,2670 ; 2508,1755 3675,1755 ; 3676,2670 3663,2670 2230,2670 2180,2670 ; 786,2242 1037,2242 1037,2670 ; 786,2242 786,2670 1037,2670 ; 1037,2670 2180,2670 ; 2180,2670 2180,2205 2508,2205 2508,1662 ; 1339,123 2146,123 2146,480 1339,480 1339,123 ; 2852,335 2852,1545 3674,1545 3674,180 3520,180 3520,335 2852,335
  text "LEDs" at 856.8,2612.69 h30
  text "PB0" at 808.33,1885.19 h30
  text "Boost + Servo" at 1618.07,1791.32 h30
  text "USB" at 3570,1774 h30
  text "Pressure" at 1254.3,1641.51 h30
  text "SCL" at 2029,1057 h30
  text "SDA" at 1754,1056 h30
  text "Proximity" at 2210,890 h30
  text "Buck-Boost" at 2867.54,355.18 h30
  text "Programming Header" at 885.56,275.69 h30
  text "Reset" at 1985.38,141.06 h30
  text "Team V-Squared / Vishnu Dodballapur / Venkat Tata / Pet Feeder" at 2757.6,48 h30

## Text inside footprints (layer, text, board x,y; h text height)
H1: Mechanical 13 "PCB END" at 3729,2074 h19.68 r90